# Altium PCB PCB1.PcbDoc
Units mil, origin at the board's own origin, x right, y up, seen from the top; angles counter-clockwise.
Board outline 9842.52 x 5905.51 mil, 2 copper layers (Top Layer, Bottom Layer); 82 components, 44 nets, 243 pads, 17 vias.
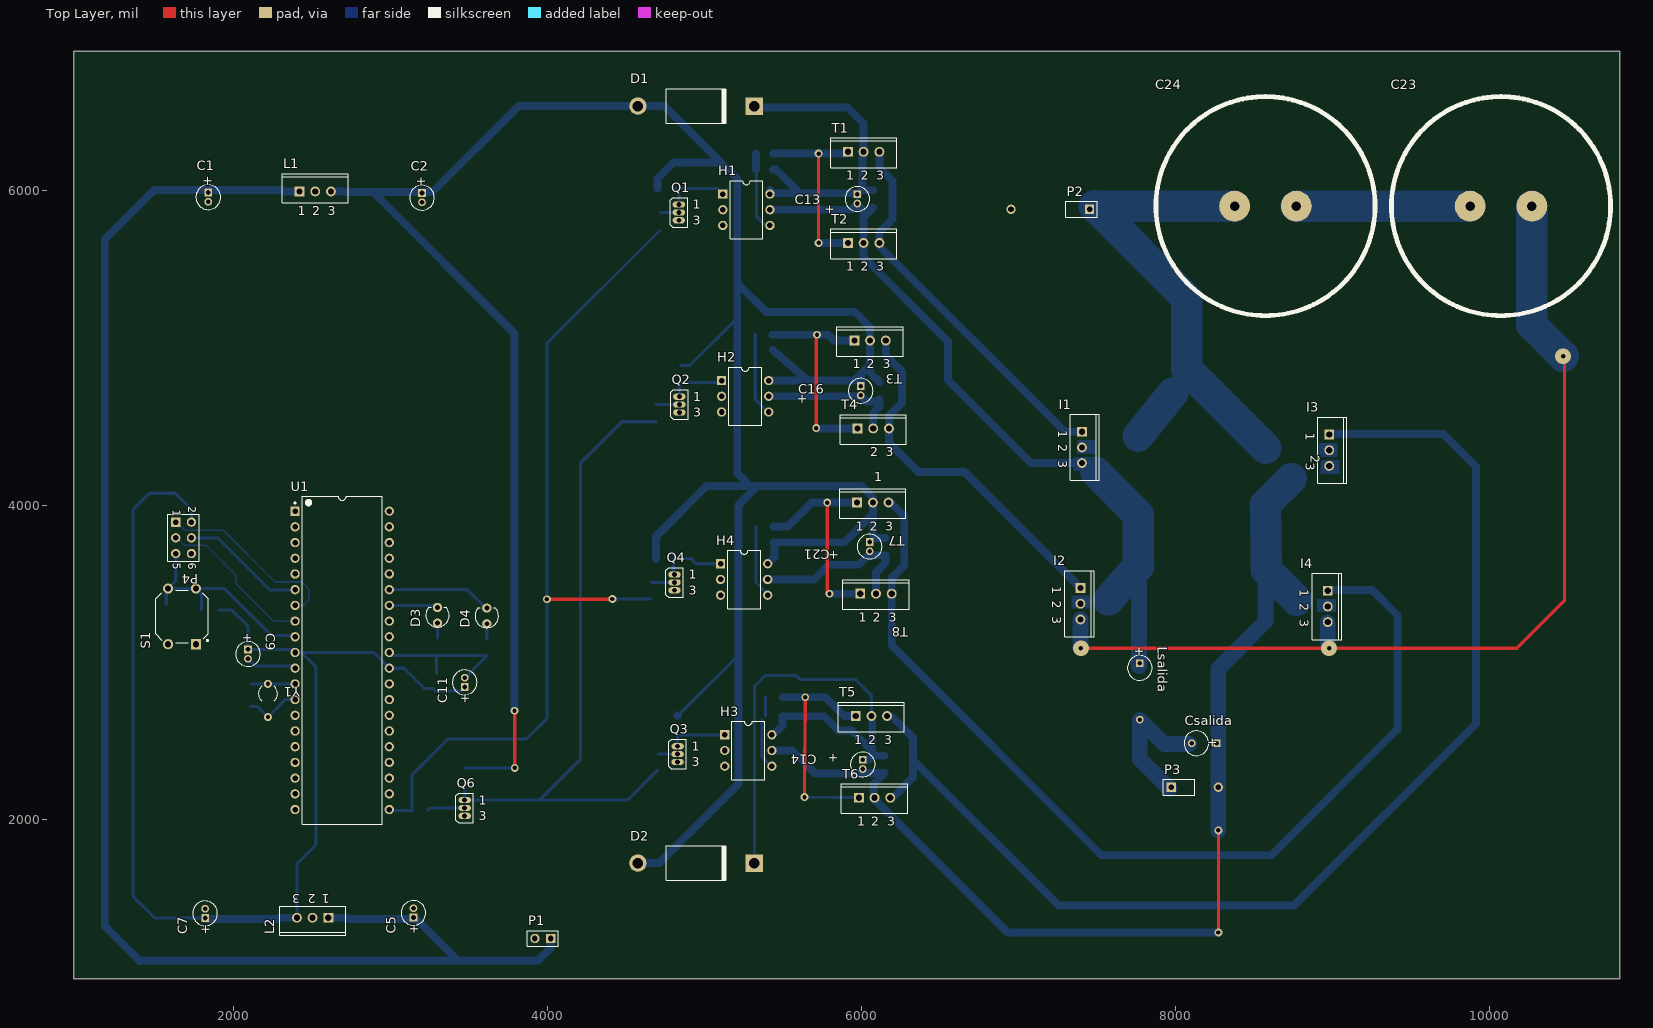
[diagram p0: Top Layer view]
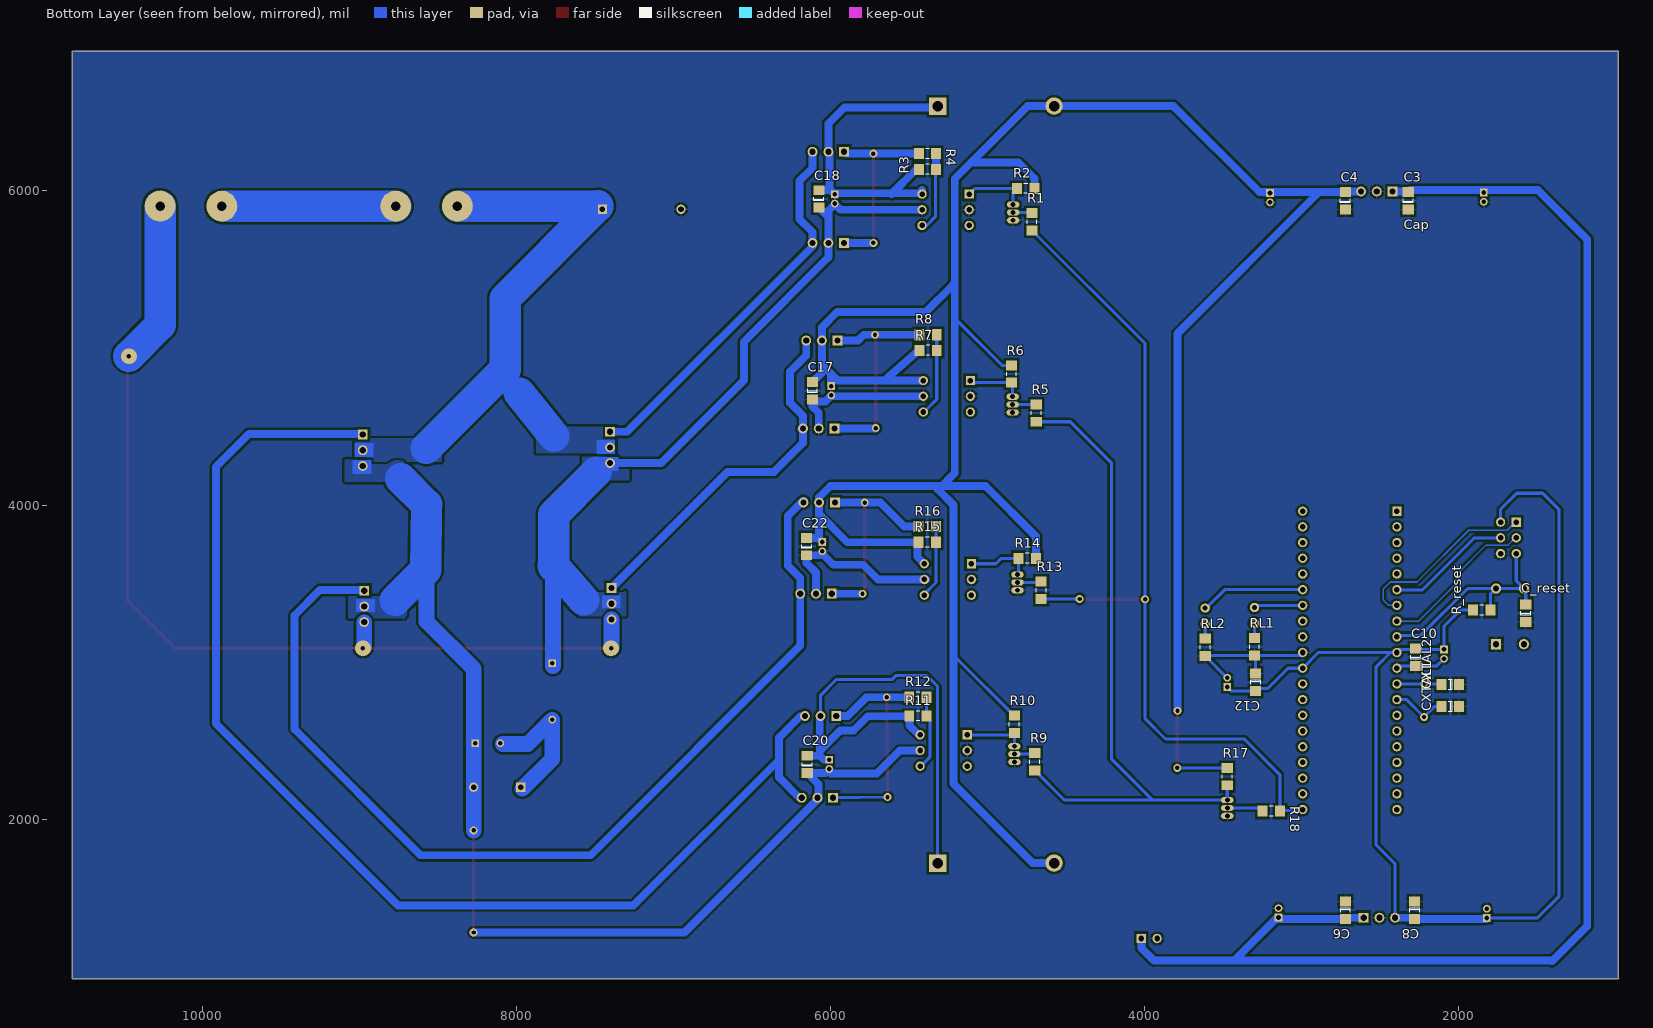
[diagram p1: Bottom Layer view, seen from below]

## Layer stack, top to bottom
Top Layer: signal copper 1.4
Dielectric: dielectric 12.6, FR-4, Dk 4.8
Bottom Layer: signal copper 1.4

## Board outline
984.25,6889.76 10826.77,6889.76 10826.77,984.25 984.25,984.25

## Design rules (kind name [scope] priority, off if disabled: settings)
Clearance [All] p1: gap=15
ComponentClearance [All] p1: gap=10 collisioncheckmode=3 verticalgap=10
PolygonConnect [All] p1: connectstyle=Relief reliefconductorwidth=10 reliefentries=4 polygonreliefangle="90 Angle"
RoutingVias [All] p1: holewidth=28 width=50 viastyle="Through Hole" minholewidth=28 minwidth=50 maxholewidth=28 maxwidth=50
SolderMaskExpansion [All] p1: expansion=4
TestPointUsage [All] p1: valid=0 allowmultiple=FALSE
Testpoint [All] p1: side=15 testpointundercomponent=TRUE minsize=40 maxsize=100 preferedsize=60 minholesize=0 maxholesize=40 preferedholesize=32 testpointgrid=1 style=1023 order=0123456789
Width [All] p1: maxlimit=200 minlimit=10 preferedwidth=10 toplayer_prefwidth=40 bottomlayer_prefwidth=40 minimp=50.000000 maximp=50.000000 favimp=50.000000
18 further rules are at their usual default settings.

## Classes and differential pairs
component class "puente H rama 2": C14 C20 C21 C22 D2 H3 H4 I3 I4 Q3 Q4 R9 R10 R11 R12 R13 R14 R15 R16 T5 T6 T7 T8
component class "puente H rama 1": C13 C16 C17 C18 D1 H1 H2 I1 I2 Q1 Q2 R1 R2 R3 R4 R5 R6 R7 R8 T1 T2 T3 T4
component class micro: C5 C6 C7 C8 C9 C10 C11 C12 C_reset CXTAL1 CXTAL2 D3 D4 L2 P4 Q6 R17 R18 R_reset RL1 RL2 S1 U1 Y1
component class alimentacion: C1 C2 C3 C4 C23 C24 Csalida L1 Lsalida P1 P2 P3

## Components (designator, comment, footprint, x,y, rotation, side; value= is the part's Value field where it differs from the comment)
C1 "Cap Pol1" A#1 1840,5960 r270 top
C2 "Cap Pol1" A#1 3200.94,5956.85 r270 top
C3 "Cap" C1206 2320.94,5936.85 r90 bottom
C4 "Cap" C1206 2720.94,5936.85 r90 bottom
C5 "Cap Pol1" A#1 3146.61,1402.83 r90 top
C6 "Cap" C1206 2720,1420 r270 bottom
C7 "Cap Pol1" A#1 1820,1400 r90 top
C8 "Cap" C1206 2280,1420 r270 bottom
C9 "Cap Pol1" A#1 2092.87,3051.02 r270 top
C10 "Cap" C1206 2272.87,3031.02 r90 bottom
C11 "Cap Pol1" A#1 3472.87,2871.02 r90 top
C12 "Cap" C1206 3292.87,2871.02 r270 bottom
C13 "Cap Pol1" A#1 5973.07,5949.13 r270 top
C14 "Cap Pol1" A#1 6007.56,2348.35 r270 top
C16 "Cap Pol1" A#1 5994.02,4727.56 r270 top
C17 "Cap" C1206 6114.02,4727.56 r90 bottom
C18 "Cap" C1206 6073.07,5949.13 r90 bottom
C20 "Cap" C1206 6147.56,2348.35 r90 bottom
C21 "Cap Pol1" A#1 6051.18,3735.28 r270 top
C22 "Cap" C1206 6151.18,3735.28 r90 bottom
C23 "Cap Pol1" "Capacitor gigante" 10071.5,5903.15 r90 top
C24 "Cap Pol1" "Capacitor gigante" 8571.5,5903.15 r90 top
C_reset "Ci" C1206 1572.87,3311.02 r90 bottom
Csalida "Cap" A#2 8131.5,2483.15 r180 top
CXTAL1 "Ci" C1206 2052.87,2716.02 r0 bottom
CXTAL2 "Ci" C1206 2052.87,2856.02 r0 bottom
D1 "MUR460" DO-201AD 4946.3,6540 r0 top
D2 "MUR460" DO-201AD 4946.3,1720 r0 top
D3 "LED3" "LED Blue 3mm TH V" 3299.49,3297.64 r90 top
D4 "LED3" "LED Blue 3mm TH V" 3613.5,3293.86 r90 top
H1 "H11L1" DIP-6 5266.46,5880 r270 top
H2 "H11L1" DIP-6 5258.58,4692.28 r270 top
H3 "H11L1" DIP-6 5278.74,2437.01 r270 top
H4 "H11L1" DIP-6 5251.97,3525.98 r270 top
I1 "IRF540" TO-220AB 7402.52,4366.77 r270 top
I2 "IRF540" TO-220-AB 7393.23,3371.81 r270 top
I3 "IRF540" TO-220AB 8977.64,4349.13 r270 top
I4 "IRF540" TO-220-AB 8968.35,3354.17 r270 top
L1 "LM7809" TO-220AB 2520.94,5996.85 r0 top
L2 "LM7805" TO-220AB 2504.57,1371.97 r180 top
Lsalida "Inductor" A#3 7771.5,2963.15 r270 top
P1 "Header 2" HDR1X2#1 4020,1240 r180 top
P2 "Header 2" HDR1X2#2 7451.5,5883.15 r180 top
P3 "Header 2" HDR1X2#3 7971.5,2203.15 r0 top
P4 "Header 3X2" HDR2X3 1632.87,3891.02 r270 top
Q1 "BS170" E3 4836.22,5863.15 r0 top
Q2 "BS170" E3 4839.53,4639.69 r0 top
Q3 "BS170" E3 4828.66,2413.94 r0 top
Q4 "BS170" E3 4808.82,3507.24 r0 top
Q6 "BS170" E3 3472.87,2071.02 r0 top
R1 "Res1" 3216[1206] 4716.22,5803.15 r90 bottom
R2 "Res1" 3216[1206] 4756.22,6015.28 r180 bottom
R3 "Res1" 3216[1206] 5381.69,6137.44 r0 bottom
R4 "Res1" 3216[1206] 5381.69,6237.44 r180 bottom
R5 "Res1" 3216[1206] 4689.45,4585.51 r90 bottom
R6 "Res1" 3216[1206] 4846.61,4834.17 r90 bottom
R7 "Res1" 3216[1206] 5378.03,4984.33 r0 bottom
R8 "Res1" 3216[1206] 5378.03,5084.33 r180 bottom
R9 "Res1" 3216[1206] 4698.66,2365.71 r90 bottom
R10 "Res1" 3216[1206] 4828.66,2603.94 r90 bottom
R11 "Res1" 3216[1206] 5442.52,2656.38 r0 bottom
R12 "Res1" 3216[1206] 5442.52,2776.38 r180 bottom
R13 "Res1" 3216[1206] 4657.95,3457.01 r90 bottom
R14 "Res1" 3216[1206] 4746.3,3660 r180 bottom
R15 "Res1" 3216[1206] 5383.15,3763.31 r0 bottom
R16 "Res1" 3216[1206] 5383.15,3863.31 r180 bottom
R17 "Res Semi" 3216[1206] 3472.87,2271.02 r90 bottom
R18 "Res Semi" 3216[1206] 3192.87,2051.02 r180 bottom
R_reset "Res Semi" 3216[1206] 1852.87,3331.02 r0 bottom
RL1 "Res Semi" 3216[1206] 3299.49,3097.64 r90 bottom
RL2 "Res Semi" 3216[1206] 3613.5,3093.86 r90 bottom
S1 "IT-2175" IT-2175 1672.87,3291.02 r90 top
T1 "TIP110" TO-220-AB 6013.07,6249.13 r0 top
T2 "TIP115" TO-220-AB 6013.07,5669.13 r0 top
T3 "TIP110" TO-220-AB 6054.02,5047.56 r0 top
T4 "TIP115" TO-220-AB 6074.02,4487.56 r0 top
T5 "TIP110" TO-220-AB 6062.52,2656.38 r0 top
T6 "TIP115" TO-220-AB 6082.52,2136.38 r0 top
T7 "TIP110" TO-220-AB 6071.65,4015.43 r0 top
T8 "TIP115" TO-220-AB 6091.65,3435.43 r0 top
U1 "ATmega16-16PU" 40P6 2692.87,3011.02 r0 top
Y1 "16MHz" R38 2220,2800 r180 top

## Footprints (in the part's own frame and the unit in brackets; to place one, negate y for a bottom-side part, rotate by r counter-clockwise, add the part's x,y. Pads: shape width x height; smd on the part's side, far side on the other; paste and mask are expansions set on the pad)
40P6 [mm] "40-Pin Ceramic Dual In-Line Package (CerDIP)"
  rect 1.5x1.5 hole 0.9: 1(-7.62,24.13)
  round 1.5 hole 0.9: 2(-7.62,21.59) 3(-7.62,19.05) 4(-7.62,16.51) 5(-7.62,13.97) 6(-7.62,11.43) 7(-7.62,8.89) 8(-7.62,6.35) 9(-7.62,3.81) 10(-7.62,1.27) 11(-7.62,-1.27) 12(-7.62,-3.81) 13(-7.62,-6.35) 14(-7.62,-8.89) 15(-7.62,-11.43) 16(-7.62,-13.97) 17(-7.62,-16.51) 18(-7.62,-19.05) 19(-7.62,-21.59) 20(-7.62,-24.13) 21(7.62,-24.13) 22(7.62,-21.59) 23(7.62,-19.05) 24(7.62,-16.51) 25(7.62,-13.97) 26(7.62,-11.43) 27(7.62,-8.89) 28(7.62,-6.35) 29(7.62,-3.81) 30(7.62,-1.27) 31(7.62,1.27) 32(7.62,3.81) 33(7.62,6.35) 34(7.62,8.89) 35(7.62,11.43) 36(7.62,13.97) 37(7.62,16.51) 38(7.62,19.05) 39(7.62,21.59) 40(7.62,24.13)
  silkscreen extent -7.74,-26.5 6.45,26.5, body extent -7.05,-26.47 7.05,26.47, height 4.83
3216[1206] [mm] "Chip Resistor; Body 3.2 x 1.6 mm (LxW typ)"
  rect 1.6x1.8 smd: 1(-1.4,0) 2(1.4,0)
  silkscreen extent -0.3,-0.8 0.3,0.8
A#1 [mm] "Capacitor, Electrolytic, Radial; Body 4 x 5 mm (Dia.xH typ); Pin Spacing 1.5 mm (typ)"
  rect 1.25x1.25 hole 0.75: 1(-0.75,0)
  round 1.25 hole 0.75: 2(0.75,0)
  silkscreen extent -2,-2 2,2
A#2 [mm] "Capacitor, Electrolytic, Radial; Body 4 x 5 mm (Dia.xH typ); Pin Spacing 1.5 mm (typ)"
  rect 1.25x1.25 hole 0.75: 1(-3.29,0)
  round 1.25 hole 0.75: 2(0.75,0)
  silkscreen extent -2,-2 2,2
A#3 [mm] "Capacitor, Electrolytic, Radial; Body 4 x 5 mm (Dia.xH typ); Pin Spacing 1.5 mm (typ)"
  rect 1.25x1.25 hole 0.75: 1(-0.75,0)
  round 1.25 hole 0.75: 2(8.37,0)
  silkscreen extent -2,-2 2,2
C1206 [mm] "Chip Capacitor; Body 3.2 x 1.6 mm (LxW typ)"
  rect 1.6x1.8 smd: 1(-1.4,0) 2(1.4,0)
  silkscreen extent -0.3,-0.8 0.3,0.8
"Capacitor gigante" [mil]
  round 196 hole 60: 1(0,196.85) 2(0,-196.85)
  silkscreen extent -698,-698 698,698
DIP-6 [mm] "DIP; 6 Leads; Row Spacing 7.62 mm; Pitch 2.54 mm"
  rect 1.5x1.5 hole 0.9: 1(-2.54,-3.81)
  round 1.5 hole 0.9: 2(0,-3.81) 3(2.54,-3.81) 4(2.54,3.81) 5(0,3.81) 6(-2.54,3.81)
  silkscreen extent -4.7,-2.65 4.7,2.65
DO-201AD [mm] "Diode, Axial; Body 9.5 x 5.6 mm (LxDia. max), Lead Dia. 1.32 mm (max)"
  round 2.8 hole 1.7: 1(-9.42,0)
  rect 2.8x2.8 hole 1.7: 2(9.42,0)
  silkscreen extent -4.8,-2.8 4.9,2.8
E3 [mm] "TO, Flat Index; 3 In-Line, Axial Leads; Body Dia. 4.6mm; Lead Dia. 0.5 mm (max)"
  oval 2x1 hole 0.8: 1(0,1.27) 2(0,0) 3(0,-1.27)
  silkscreen extent -1.41,-2.41 1.41,2.41
HDR1X2#1 [mm] "Connector; Header; 2 Position"
  rect 1.5x1.5 hole 0.9: 1(0,0)
  round 1.5 hole 0.9: 2(2.54,0)
  silkscreen extent -1.27,-1.27 3.81,1.27
HDR1X2#2 [mm] "Connector; Header; 2 Position"
  rect 1.5x1.5 hole 0.9: 1(0,0)
  round 1.5 hole 0.9: 2(12.7,0)
  silkscreen extent -1.27,-1.27 3.81,1.27
HDR1X2#3 [mm] "Connector; Header; 2 Position"
  rect 1.5x1.5 hole 0.9: 1(0,0)
  round 1.5 hole 0.9: 2(7.62,0)
  silkscreen extent -1.27,-1.27 3.81,1.27
HDR2X3 [mm] "Connector; Header; 3x2 Position"
  rect 1.5x1.5 hole 0.9: 1(0,0)
  round 1.5 hole 0.9: 2(0,2.54) 3(2.54,0) 4(2.54,2.54) 5(5.08,0) 6(5.08,2.54)
  silkscreen extent -1.27,-1.27 6.35,3.81
IT-2175 [mm] "Switch, Push Button, Thru-Hole; 4 Leads; Body 8.5 x 8.5 mm (LxW typ); Row Spacing 9.0 mm; Pitch 4.5 mm"
  rect 1.65x1.65 hole 1: 1(-4.5,-2.25)
  round 1.65 hole 1: 2(4.5,-2.25) 3(-4.5,2.25) 4(4.5,2.25)
  silkscreen extent -4.25,-4.25 4.25,4.25
"LED Blue 3mm TH V" [mm] "LED Blue 3mm TH V"
  round 1.5 hole 0.8: 1(1.27,0) 2(-1.27,0)
  silkscreen extent -1.9,-1.9 1.28,1.9, body extent -1.6,-1.6 1.5,1.6, height 6.6
R38 [mm] "Crystal, Thru-Hole; 2 Leads; Body 3.1 x 8.2 mm (Dia.xH)"
  round 1.3 hole 0.7: 1(0,3.81) 2(0,-1.55)
  silkscreen extent -1.55,-1.19 1.55,1.17
TO-220-AB [mm] "TO, Thru-Hole, Vertical, Heatsink Mounted; 3 In-Line Leads; Pitch 2.54 mm"
  rect 1.6x1.6 hole 1: 1(-2.54,0)
  round 1.6 hole 1: 2(0,0) 3(2.54,0)
  silkscreen extent -5.35,-2.55 5.35,2.25
TO-220AB [mm] "TO, Thru-Hole, Vertical, Heatsink Mounted; 3 In-Line Leads; Pitch 2.54 mm"
  rect 1.6x1.6 hole 1: 1(-2.54,0)
  round 1.6 hole 1: 2(0,0) 3(2.54,0)
  silkscreen extent -5.35,-1.85 5.35,2.85

## Part data
C1 C2 C5 C7 C9 C11 C13 C14 C16 C21 C23 C24: "Polarized Capacitor (Radial)"
C3 C4 C6 C8 C10 C12 C17 C18 C20 C22 Csalida: "Capacitor"
C_reset CXTAL1 CXTAL2: library part "Cap Semi", "Capacitor (Semiconductor SIM Model)"
D1 D2: library part Diode, "Default Diode"
D3 D4: "Typical BLUE SiC LED"
I1 I2 I3 I4 Q1 Q2 Q3 Q4 Q6: library part MOSFET-N, "N-Channel MOSFET"
L2: library part LM7809
P1 P2 P3: "Header, 2-Pin"
P4: "Header, 3-Pin, Dual row"
R1 R2 R3 R4 R5 R6 R7 R8 R9 R10 R11 R12 R13 R14 R15 R16: "Resistor"
R17 R18 R_reset RL1 RL2: "Semiconductor Resistor"
S1: "Tactile Switch, DPST; Thru-Hole; Vertical; Rating DC 12V, 50mA (max)"
T1 T3 T5 T7: library part NPN, "NPN Bipolar Transistor"
T2 T4 T6 T8: library part PNP, "PNP Bipolar Transistor"
U1: "8-bit AVR Microcontroller, 4.5-5.5V, 16KB Flash, 512 Bytes EEPROM, 1KB SRAM, 40-pin PDIP, Industrial Grade (-40°C to 85°C), Pb-Free"
Y1: library part XTAL, "Crystal Oscillator"

## Via types
v1: diameter 50, hole 28, Top Layer to Bottom Layer, 14 vias
v2: diameter 100, hole 28, Top Layer to Bottom Layer, 3 vias

## Nets (pads, with @x,y where several pads share a name; then routed paths per layer and width w, separated by ;. In a path a pad name is that pad's centre, name@x,y a point inside that pad or via, vN(x,y) a via of type N, cw(c..) or ccw(c..) an arc to the next point about the centre after c; other vN are vias at no path point)
5V: C7.1 C8.2 C9.1 C10.2 C11.1 C12.2 L2.3 P4.2 R_reset.2 U1.10 U1.30 | length 7732
  Bottom Layer w20: P4.2 1732.87,3972.13 1630,4075 1465,4075 1360,3970 1360,1510 1499.53,1370.47 C7.1 ; R_reset.2 1989.72,3331.02 2092.87,3227.87 C9.1 2373.35,3080.55 U1.10 2892.87,3061.02 U1.30 3086.02,2961.02 3215,2832.05 C12.2@3276.73,2832.05 ; L2.3 2404.57,1714.57 2525,1835 2525,2970 2433.98,3061.02 ; C12.2@3280,2815 3446.38,2815 C11.1
  Bottom Layer w50: C7.1@1825.59,1364.88 C8.2 ; C8.2@2287.09,1371.97 L2.3
9V: C2.1 C4.2 C16.1 C17.2 C21.1 C22.2 D1.1 D2.1 H2.6 H4.6 L1.3 R2.2 R6.2 R7.2 R10.2 R14.2 R15.2 R17.2 T3.2 T7.2 | length 18923.5
  Top Layer w20: v1(3791.14,2326.14) v1@3791.14,2691.14
  Bottom Layer w20: R17.2 v1(3791.14,2326.14) ; R10.2@4830.35,2659.05 5191.23,3019.93 ; R6.2 4907.17,4889.29 5207.88,5190
  Bottom Layer w50: L1.3 2716.06,5996.85 C4.2 3267.17,5991.97 3815.2,6540 4744.89,6540 4898.09,6386.8 ; 2906.97,5975 3790,5091.97 v1(3790,2690) ; D2.1 4711.3,1720 5216.3,2225 5216.3,4000 5313.8,4097.5 5207.88,4203.42 5207.88,6077.01 4890.78,6394.11 ; R14.2 4691.18,3799.88 5011.3,4120 6001.3,4120 6071.65,4049.65 ; R2.2 4701.1,6079.8 4801.3,6180 5104.89,6180 ; R10.2 R10.2@4830.35,2659.06 ; 5221.3,5400 5391.3,5230 5956.3,5230 6054.02,5132.28 6054.02,4842.68 C17.2 ; H4.6 5446.3,3670.31 R15.2@5446.3,3763.31 ; H2.6 5953.58,4792.28 6054.02,4892.72 ; R7.2@5435.24,4986.71 5656.3,4792.28 ; R15.2 5892.99,3763.31 6073.17,3943.48 ; C16.1@5996.3,4765 5996.3,4835 ; C21.1 6051.18,3765.35 6076.22,3790.39 C22.2 ; 6071.65,3794.96 T7.2@6071.65,4044.65
"ARDUINO 1": R1.1 R13.1 R18.2 U1.21 | length 5453
  Top Layer w20: v1(3996.3,3400) v1@4411.3,3400
  Bottom Layer w20: U1.21@2985,2055 R18.2@3133.78,2055 ; R18.2 3137.76,2282.76 3365,2510 3866.3,2510 3996.3,2640 3996.3,5028.11 R1.1 ; v1(4413.19,3401.89) R13.1
"ARDUINO 2": Q6.1 R5.1 R9.1 R17.1 | length 4243.5
  Bottom Layer w20: R17.1 Q6.1 4509.1,2121.02 R9.1 ; 3947.32,2121.02 4211.3,2385 4211.3,4270 4471.69,4530.39 R5.1
B1: C13.2 C18.1 H1.5 I1.3 I2.2 Lsalida.1 T2.2 | length 4746
  Bottom Layer w50: H1.5 5935.69,5880 C13.2@5971.91,5916.22 ; C13.2@5971.3,5915 6013.07,5873.23 6013.07,5576.93 6550,5040 6550,4795 7078.23,4266.77 I1.3 ; 6013.07,5834.02 C18.1
  Bottom Layer w100: Lsalida.1@7766.5,2973.15 7766.5,3633.62
  Bottom Layer w200: 7490,4210 7761.5,3938.5 7761.5,3608.15 ; 7570,3395 7755,3605 ; 7766.5,3613.15 7766.5,3618.15
B2: C14.2 C20.1 Csalida.1 H3.5 I3.3 I4.2 P3.2 T6.2 | length 6904.8
  Top Layer w20: v1(8271.5,1278.15) v1(8271.5,1928.15)
  Bottom Layer w50: H3.5 5558.31,2437.01 5705.31,2290 5995.85,2290 C14.2@6007.56,2318.27 ; C14.2@6006.3,2317.01 C14.2@6007.56,2318.27 ; C14.2 C14.2@6007.56,2318.27 ; 6032.6,2293.23 C20.1 6076.3,2221.97 6076.3,2130.16 T6.2 6082.52,2124.8 6929.17,1278.15 v1(8271.5,1278.15)
  Bottom Layer w100: v1(8271.5,1928.15) 8271.5,2958.15 8571.5,3258.15 8571.5,3608.15
  Bottom Layer w200: 8736.67,4168.33 8571.5,4003.15 8576.5,3588.15 8769.82,3394.82
GND: C1.2 C2.2 C3.1 C4.1 C5.2 C6.1 C7.2 C8.1 C9.2 C10.1 C11.2 C12.1 C16.2 C17.1 C21.2 C22.1 C23.2 C_reset.1 CXTAL1.1 CXTAL2.1 H1.2 H2.2 H2.5 H3.2 H4.2 H4.5 I2.3 I4.3 L1.2 L2.2 P1.2 P2.2 P4.6 Q1.3 Q2.3 Q3.3 Q4.3 Q6.3 RL1.1 RL2.1 S1.1 S1.3 T4.2 T8.2 U1.11 U1.31 | length 9393.7
  Top Layer w20: v2(7396.5,3088.15) 10171.5,3088.15 10476.5,3393.15 v2@10476.5,4938.15
  Bottom Layer w20: C9.2 2138.46,2975.91 2377.99,2975.91 U1.11 ; U1.31@3011.38,3042.52 RL2.1@3609.72,3042.52 ; C12.1 3292.87,3035.91 RL1.1 ; C11.2 3475.32,2900.55 RL2.1
  Bottom Layer w50: H4.5@5391.3,3525 5696.3,3525 5791.3,3620 5981.3,3620 C21.2@6051.18,3689.88 ; H2.5 C16.2@5988.82,4692.28 ; C16.2 5994.02,4697.48 6031.5,4660 6101.57,4660 C17.1 6114.02,4627.72 6074.02,4587.72 T4.2 ; C21.2@6051.18,3695.12 6066.14,3680.16 C22.1 6151.18,3629.88 6091.65,3570.35 T8.2
  Bottom Layer w100: v2@7393.23,3091.42 I2.3 ; v2@8968.35,3096.3 I4.3
  Bottom Layer w200: C23.2 10268.35,5146.3 v2(10466.5,4948.15)
  other v2: 8976.5,3088.15
LED1: D4.1 U1.35 | length 661.8
  Bottom Layer w20: U1.35 3488.98,3461.02 D4.1@3606.14,3343.86
LED2: D3.1 U1.34 | length 293.2
  Bottom Layer w20: U1.34 D3.1@3286.1,3361.02
MISO: P4.1 U1.7 | length 1194.8
  Bottom Layer w10: P4.1@1638.98,3891.02 1690,3840 1935,3840 2265,3510 2435,3510 2480,3465 2480,3395 2446.02,3361.02 U1.7
  Bottom Layer w20: P4.1 P4.1@1638.98,3891.02
MOSI: P4.4 U1.6 | length 796.1
  Bottom Layer w20: P4.4 1898.98,3791.02 2230,3460 U1.6@2391.85,3460
NetC13_1: C13.1 C18.2 D1.2 H1.6 R3.2 T1.2 | length 2053.7
  Bottom Layer w50: D1.2@5327.17,6530 5911.3,6530 6013.07,6428.23 T1.2 ; H1.6@5416.46,6005 5436.46,5985 5958.86,5985 5968.86,5975 6006.3,6012.44 T1.2@6006.3,6242.36 ; R3.2 5453.86,6137.44 5611.3,5980 ; C13.1 C13.1@5973.07,5979.21 ; 6014.49,6004.25 C18.2
NetC14_1: C14.1 C20.2 D2.2 H3.6 R11.2 T5.2 | length 3259.7
  Bottom Layer w20: D2.2 5317.17,2844.13 5388.03,2915 5581.3,2915 5606.3,2890 5961.3,2890 6062.52,2788.78 T5.2
  Bottom Layer w50: H3.6 5438.31,2537.01 5496.3,2595 5496.3,2655.04 5761.26,2655.04 5851.3,2565 5936.3,2565 6059.57,2441.73 ; 6032.81,2377.87 6042.24,2377.87 6067.83,2403.46 ; T5.2@6067.83,2651.06 6067.83,2403.46 ; C20.2 6067.83,2403.46
NetC23_1: C23.1 C24.2 | length 1092.4
  Bottom Layer w200: C24.2 C23.1@9860.79,5903.15
NetCsalida_2: Csalida.2 Lsalida.2 P3.1 | length 898.6
  Bottom Layer w100: P3.1@7961.5,2193.15 7771.5,2383.15 Lsalida.2 7926.97,2478.15 Csalida.2@8086.5,2478.15
NetD3_2: D3.2 RL1.2 | length 94.9
  Bottom Layer w20: RL1.2 D3.2
NetD4_2: D4.2 RL2.2 | length 94.9
  Bottom Layer w20: RL2.2 D4.2
NetH1_1: H1.1 Q1.1 R2.1 | length 432.2
  Bottom Layer w20: Q1.1 4836.22,5990.39 R2.1 5081.18,6015.28 H1.1
NetH1_4: H1.4 R3.1 R4.2 | length 502.9
  Bottom Layer w20: R3.1@5331.3,6130 5331.3,5835 5386.3,5780 H1.4
  Bottom Layer w50: R3.1 R4.2
NetH2_1: H2.1 Q2.1 R6.1 | length 340.8
  Bottom Layer w20: Q2.1@4839.53,4698.23 4839.53,4771.97 4846.3,4778.74 R6.1@4846.3,4770 ; R6.1 H2.1@5095.36,4779.06
NetH2_4: H2.4 R7.1 R8.2 | length 525.6
  Bottom Layer w20: R8.2 5322.91,4673.39 H2.4@5404.02,4592.28
NetH3_1: H3.1 Q3.1 R10.1 | length 363.7
  Bottom Layer w20: Q3.1 R10.1 ; R10.1@4842.48,2535 H3.1@5121.3,2535
NetH3_4: H3.4 R11.1 R12.2 | length 446.7
  Bottom Layer w20: R11.1@5366.3,2635.28 5366.3,2395 5424.29,2337.01 H3.4 ; R11.1 R12.2
NetH4_1: H4.1 Q4.1 R14.1 | length 410
  Bottom Layer w20: Q4.1@4801.42,3564.65 R14.1 4911.3,3660 4945.31,3625.98 H4.1
NetH4_4: H4.4 R15.1 R16.2 | length 461.1
  Bottom Layer w20: R16.2 R15.1 5328.03,3506.73 H4.4@5401.97,3432.8
NetI1_2: I1.1 T1.3 T2.3 | length 2448.7
  Bottom Layer w50: T1.3 6113.07,6148.23 6196.3,6065 6196.3,5820 6113.07,5736.77 6113.07,5648.23 7294.53,4466.77 I1.1
NetI2_2: I2.1 T3.3 T4.3 | length 2338.5
  Bottom Layer w50: T3.3 6154.02,4952.28 6256.3,4850 6256.3,4650 6174.02,4567.72 6174.02,4395.98 6360,4210 6655.04,4210 I2.1 ; T4.3@6176.57,4485 T4.3@6185,4485
NetI3_2: I3.1 T5.3 T6.3 | length 7765.4
  Bottom Layer w50: T5.3@6174.92,2656.38 6176.3,2655 6191.3,2655 6326.3,2520 6326.3,2265 6197.68,2136.38 T6.3 ; 6326.3,2378.7 7255,1450 8753.35,1450 9911.5,2608.15 9911.5,4243.15 9701.5,4453.15 I3.1@8977.64,4453.15
NetI4_2: I4.1 T7.3 T8.3 | length 6330.4
  Bottom Layer w50: T7.3@6166.3,4025 6176.3,4025 6271.3,3930 6271.3,3615 6191.65,3535.35 6191.65,3105 7526.65,1770 8610,1770 9411.5,2571.5 9411.5,3298.15 9250.69,3458.95 I4.1@8981.51,3458.95
NetQ1_2: Q1.2 R1.2 | length 115.1
  Bottom Layer w20: R1.2@4721.1,5863.15 Q1.2
NetQ2_2: Q2.2 R5.2 | length 149.1
  Bottom Layer w20: R5.2@4690.39,4639.69 Q2.2
NetQ3_2: Q3.2 R9.2 | length 123.1
  Bottom Layer w20: R9.2@4705.55,2413.94 Q3.2
NetQ4_2: Q4.2 R13.2 | length 150.9
  Bottom Layer w20: R13.2@4657.95,3507.24 Q4.2
NetQ6_2: Q6.2 R18.1 | length 236.7
  Bottom Layer w20: R18.1@3240.78,2060 3251.81,2071.02 Q6.2
NetR4_1: R4.1 T1.1 T2.1 | length 1219.6
  Top Layer w20: v1(5726.3,5669.13) v1(5726.3,6237.44)
  Bottom Layer w50: R4.1 T1.1@5901.38,6237.44 ; v1(5726.3,5669.13) T2.1
NetR8_1: R8.1 T3.1 T4.1 | length 1408.8
  Top Layer w20: v1@5711.3,4480 v1@5711.3,5090
  Bottom Layer w50: R8.1 5786.97,5084.33 5823.74,5047.56 T3.1 ; v1@5711.3,4487.56 T4.1
  other v1: 5711.3,4490 5716.3,5084.33
NetR12_1: R12.1 T5.1 T6.1 | length 1497.2
  Top Layer w20: v1(5636.3,2140) v1(5641.3,2776.38)
  Bottom Layer w20: v1(5636.3,2140) T6.1
  Bottom Layer w50: R12.1 5769.92,2776.38 5889.92,2656.38 T5.1
NetR16_1: R16.1 T7.1 T8.1 | length 1371.1
  Top Layer w20: v1@5781.3,3435.43 v1(5781.3,4015)
  Bottom Layer w50: R16.1 5529.61,3863.31 5681.3,4015 T7.1@5971.22,4015 ; v1(5795.87,3435.43) T8.1
RESET: C_reset.2 P4.5 R_reset.1 S1.2 S1.4 U1.9 | length 1408.9
  Bottom Layer w20: C_reset.2 S1.4@1572.87,3456.77 ; P4.5 1632.87,3516.77 S1.4 1941.81,3468.19 2240,3170 U1.9@2383.9,3170 ; S1.2 1797.76,3431.89 R_reset.1
SCK: P4.3 U1.8 | length 1011.8
  Bottom Layer w10: P4.3@1638.98,3791.02 1685,3745 1825,3745 2015,3555 2015,3500 2253.98,3261.02 U1.8
  Bottom Layer w20: P4.3 P4.3@1638.98,3791.02
VCC_1: C1.1 C3.2 C5.1 C6.2 L1.1 L2.1 P1.1 | length 9682.3
  Bottom Layer w50: 1405,1095 1181.1,1318.9 1181.1,5691.1 1495,6005 C3.2@2307.91,6005 ; 1410,1100 3940,1100 4020,1180 P1.1 ; C1.1@1827.74,6005 C1.1@1835.75,5996.99 ; C3.2@2325.83,5996.85 L1.1 ; L2.1 C6.2@2723.03,1371.97 ; C6.2 3163.13,1364.88 3421.5,1106.5
VCC_2: C24.1 I1.2 I3.2 P2.1 | length 3240.5
  Bottom Layer w200: 7759.86,4437.38 7980.4,4713.05 ; 8068.5,5317.32 7480.31,5905.51 7482.68,5903.15 C24.1 ; 8070.87,5314.96 8070.87,4863.78 8572.32,4362.32
XTAL1: CXTAL1.2 U1.13 Y1.1 | length 357
  Bottom Layer w20: CXTAL1.2 2153.98,2716.02 Y1.1 2328.01,2758.01 ; 2328.01,2761.02 U1.13
XTAL2: CXTAL2.2 U1.12 Y1.2 | length 276
  Bottom Layer w20: CXTAL2.2@2112.99,2861.02 Y1.2 ; Y1.2@2223.9,2861.02 U1.12
pads on no net: H1.3 H2.3 H3.3 H4.3 U1.1 U1.2 U1.3 U1.4 U1.5 U1.14 U1.15 U1.16 U1.17 U1.18 U1.19 U1.20 U1.22 U1.23 U1.24 U1.25 U1.26 U1.27 U1.28 U1.29 U1.32 U1.33 U1.36 U1.37 U1.38 U1.39 U1.40

## Polygon pours and split planes (outlines as drawn)
GND on Bottom Layer (solid): 980,6895 10805,6895 10815,6885 10825,6875 10825,980 970,980 980,990
B2 on Bottom Layer (solid): 9076.32,3418.15 9071.32,3412.38 9071.32,3279.69 8721.32,3279.69 8716.32,3273.92 8696.32,3297 8696.32,3418.15 9051.32,3418.15 9056.32,3423.92
B2 on Bottom Layer (solid): 9096.5,4287.38 9091.5,4281.61 9091.5,4148.92 8741.5,4148.92 8736.5,4143.15 8716.5,4166.23 8716.5,4287.38 9071.5,4287.38 9076.5,4293.15
B1 on Bottom Layer (solid): 7306.5,3453.15 7316.5,3443.15 7601.5,3443.15 7601.5,3303.15 7606.5,3298.15 7601.5,3293.15 7301.5,3293.15 7301.5,3448.15
B1 on Bottom Layer (solid): 7286.5,4318.15 7296.5,4308.15 7581.5,4308.15 7581.5,4168.15 7586.5,4163.15 7581.5,4158.15 7281.5,4158.15 7281.5,4313.15
VCC_2 on Bottom Layer (solid): 8474.57,4350 8474.57,4276.28 9026.5,4276.28 9026.5,4423.72 8474.57,4423.72
VCC_2 on Bottom Layer (solid): 7376.5,4414.43 7376.5,4330.71 7874.02,4330.71 7874.02,4498.15 7376.5,4498.15

## Other copper
Bottom Layer:
  rectangle net B2: 8921.72,4197.38 9041.72,4287.38
  rectangle net B1: 7335,3339.99 7455,3425
  rectangle net B2: 8900,3320 9020,3400
  rectangle net VCC_2: 8910,4305 9030,4395
  rectangle net VCC_2: 7370,4325 7490,4415
  rectangle net B1: 7350,4215 7470,4305

## Text inside footprints (layer, text, board x,y; h text height)
C1: Top Overlay "+" at 1810.47,6096.81 h59.06 r270
C2: Top Overlay "+" at 3171.42,6093.66 h59.06 r270
C5: Top Overlay "+" at 3176.14,1266.02 h59.06 r90
C7: Top Overlay "+" at 1849.53,1263.19 h59.06 r90
C9: Top Overlay "+" at 2063.35,3187.83 h59.06 r270
C11: Top Overlay "+" at 3502.4,2734.21 h59.06 r90
C13: Top Overlay "+" at 5771.34,5913.54 h59.06 r270
C14: Top Overlay "+" at 5793.39,2423.94 h59.06 r270
C16: Top Overlay "+" at 5595.43,4707.72 h59.06 r270
C21: Top Overlay "+" at 5797.01,3715.12 h59.06 r270
Csalida: Top Overlay "+" at 8268.31,2512.68 h59.06 r180
I1: Top Overlay "2" at 7251.93,4386.46 h59.06 r270; Top Overlay "1" at 7251.93,4476.61 h59.06 r270; Top Overlay "3" at 7251.93,4286.46 h59.06 r270
I2: Top Overlay "1" at 7215.08,3481.65 h59.06 r270; Top Overlay "2" at 7215.08,3391.5 h59.06 r270; Top Overlay "3" at 7215.08,3291.5 h59.06 r270
I3: Top Overlay "2" at 8861.5,4318.15 h59.05 r270; Top Overlay "1" at 8827.05,4458.98 h59.06 r270; Top Overlay "3" at 8827.05,4268.82 h59.06 r270
I4: Top Overlay "1" at 8790.2,3464.02 h59.06 r270; Top Overlay "2" at 8790.2,3373.86 h59.06 r270; Top Overlay "3" at 8790.2,3273.86 h59.06 r270
L1: Top Overlay "2" at 2501.26,5846.26 h59.06; Top Overlay "1" at 2411.1,5846.26 h59.06; Top Overlay "3" at 2601.26,5846.26 h59.06
L2: Top Overlay "2" at 2524.25,1522.56 h59.06 r180; Top Overlay "1" at 2614.41,1522.56 h59.06 r180; Top Overlay "3" at 2424.25,1522.56 h59.06 r180
Lsalida: Top Overlay "+" at 7741.97,3099.96 h59.06 r270
P4: Top Overlay "6" at 1712.87,3631.02 h50 r270; Top Overlay "5" at 1612.87,3631.02 h50 r270; Top Overlay "2" at 1712.87,3991.02 h50 r270; Top Overlay "1" at 1612.87,3971.02 h50 r270
Q1: Top Overlay "1" at 4925.79,5885 h59.05; Top Overlay "3" at 4925.79,5785.87 h59.05
Q2: Top Overlay "1" at 4929.09,4661.54 h59.05; Top Overlay "3" at 4929.09,4562.4 h59.05
Q3: Top Overlay "1" at 4918.23,2435.79 h59.05; Top Overlay "3" at 4918.23,2336.65 h59.05
Q4: Top Overlay "1" at 4898.39,3529.09 h59.05; Top Overlay "3" at 4898.39,3429.96 h59.05
Q6: Top Overlay "1" at 3562.44,2092.87 h59.05; Top Overlay "3" at 3562.44,1993.74 h59.05
T1: Top Overlay "1" at 5903.23,6070.98 h59.06; Top Overlay "2" at 5993.39,6070.98 h59.06; Top Overlay "3" at 6093.39,6070.98 h59.06
T2: Top Overlay "1" at 5903.23,5490.98 h59.06; Top Overlay "2" at 5993.39,5490.98 h59.06; Top Overlay "3" at 6093.39,5490.98 h59.06
T3: Top Overlay "1" at 5944.17,4869.41 h59.06; Top Overlay "2" at 6034.33,4869.41 h59.06; Top Overlay "3" at 6134.33,4869.41 h59.06
T4: Top Overlay "1" at 6079.21,4150.71 h59.06; Top Overlay "2" at 6054.33,4309.41 h59.06; Top Overlay "3" at 6154.33,4309.41 h59.06
T5: Top Overlay "1" at 5952.68,2478.23 h59.06; Top Overlay "2" at 6042.83,2478.23 h59.06; Top Overlay "3" at 6142.83,2478.23 h59.06
T6: Top Overlay "1" at 5972.68,1958.23 h59.06; Top Overlay "2" at 6062.83,1958.23 h59.06; Top Overlay "3" at 6162.83,1958.23 h59.06
T7: Top Overlay "1" at 5961.81,3837.28 h59.06; Top Overlay "2" at 6051.97,3837.28 h59.06; Top Overlay "3" at 6151.97,3837.28 h59.06
T8: Top Overlay "1" at 5981.81,3257.28 h59.06; Top Overlay "2" at 6071.97,3257.28 h59.06; Top Overlay "3" at 6171.97,3257.28 h59.06